# EAGLE board 32 smd (EAGLE 9.3.0)
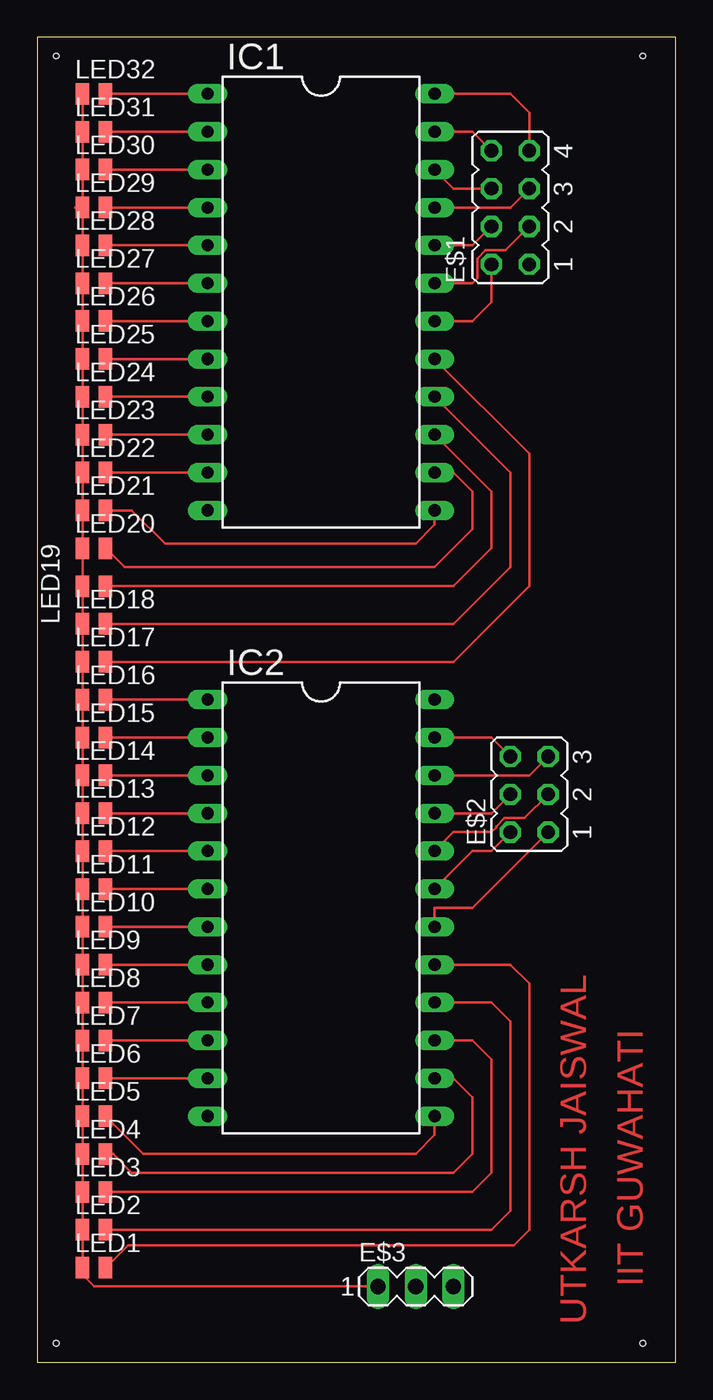
[diagram p0: board, top side]
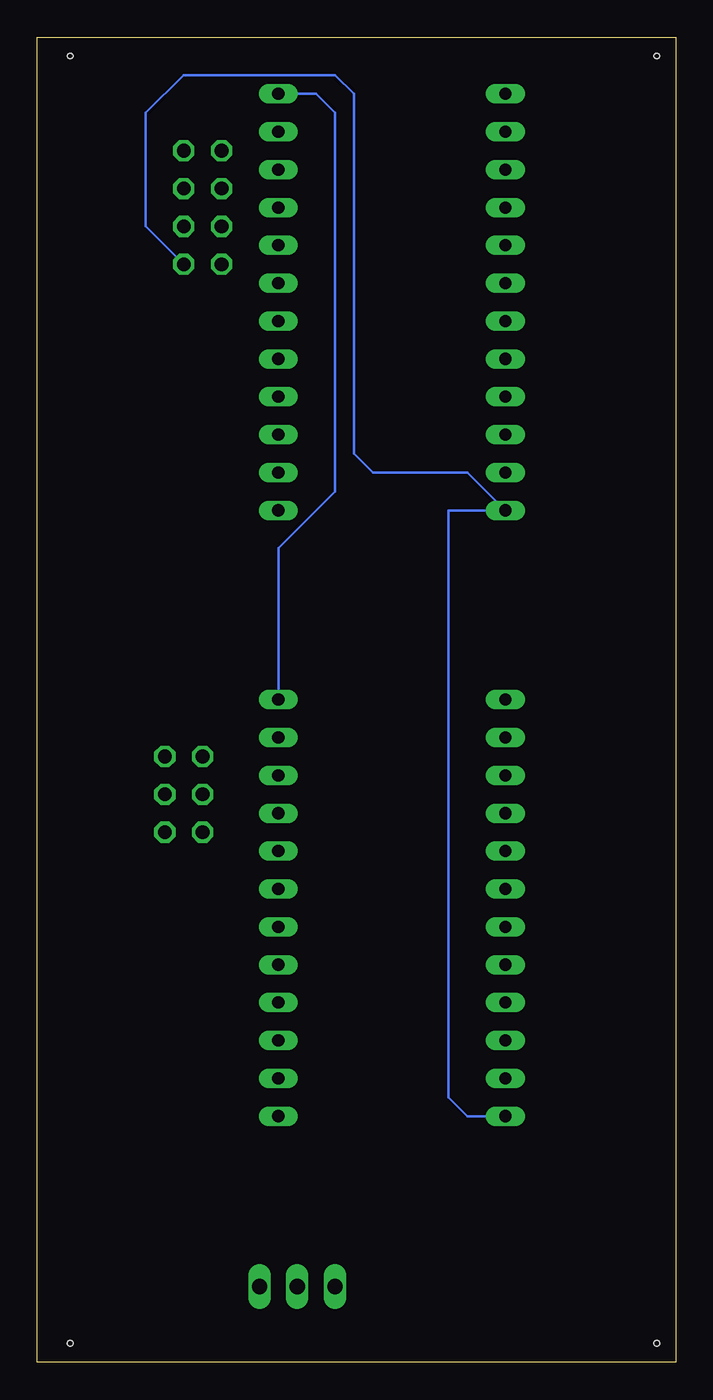
[diagram p1: board, bottom side, seen from below]

Size 42.85 x 88.89 mm. Coordinates in mm from the lower left corner, seen from the top.
Outline: 0,0 42.85,0 42.85,88.89 0,88.89 0,0
Copper layers (1*16): Top 0.035mm / dielectric 1.5mm / Bottom 0.035mm
Design rules "default": minimum track width 6mil, minimum drill 0.35mm, track to track 6mil, track to pad 6mil, pad to pad 6mil, via to via 6mil, smd to smd 6mil, copper to edge 40mil, drill to drill 6mil, minimum pad ring 10mil, minimum via ring 8mil, stop-mask expansion 4mil, vias tented up to drill 0mil, thermal gap 10mil
Holes 0.35 mm at 1.27,1.27 40.64,1.27 40.64,87.63 1.27,87.63

## Footprints (pad centres in the part's own frame; a part is rotated, then mirrored left to right if it is on the bottom)
JP4Q = drill 0.914 octagon: 1 -3.81,-1.27; 2 -3.81,1.27; 3 -1.27,-1.27; 4 -1.27,1.27; 5 1.27,-1.27; 6 1.27,1.27; 7 3.81,-1.27; 8 3.81,1.27
JP3Q = drill 0.914 octagon: 1 -2.54,-1.27; 2 -2.54,1.27; 3 0,-1.27; 4 0,1.27; 5 2.54,-1.27; 6 2.54,1.27
MA03-1 = drill 1.016 long: 1 -2.54,0; 2 0,0; 3 2.54,0
DIL24-6 = drill 0.813 long: 1 -13.97,-7.62; 2 -11.43,-7.62; 3 -8.89,-7.62; 4 -6.35,-7.62; 5 -3.81,-7.62; 6 -1.27,-7.62; 7 1.27,-7.62; 8 3.81,-7.62; 9 6.35,-7.62; 10 8.89,-7.62; 11 11.43,-7.62; 12 13.97,-7.62; 13 13.97,7.62; 14 11.43,7.62; 15 8.89,7.62; 16 6.35,7.62; 17 3.81,7.62; 18 1.27,7.62; 19 -1.27,7.62; 20 -3.81,7.62; 21 -6.35,7.62; 22 -8.89,7.62; 23 -11.43,7.62; 24 -13.97,7.62
GM1BW78140A = smd 0.9 x 1.44: A 0.77,0; C -0.77,0

## Placement (x,y rotation side)
E$1  [JP4Q]  31.75,77.47 90 top
E$2  [JP3Q]  33.02,38.1 90 top
E$3  [MA03-1]  25.4,5.08 0 top
IC1  74154N  [DIL24-6]  19.05,71.12 270 top
IC2  74154N  [DIL24-6]  19.05,30.48 270 top
LED1  GM1BW76340A  [GM1BW78140A]  3.81,6.35 0 top
LED2  GM1BW76340A  [GM1BW78140A]  3.81,8.89 0 top
LED3  GM1BW76340A  [GM1BW78140A]  3.81,11.43 0 top
LED4  GM1BW76340A  [GM1BW78140A]  3.81,13.97 0 top
LED5  GM1BW76340A  [GM1BW78140A]  3.81,16.51 0 top
LED6  GM1BW76340A  [GM1BW78140A]  3.81,19.05 0 top
LED7  GM1BW76340A  [GM1BW78140A]  3.81,21.59 0 top
LED8  GM1BW76340A  [GM1BW78140A]  3.81,24.13 0 top
LED9  GM1BW76340A  [GM1BW78140A]  3.81,26.67 0 top
LED10  GM1BW76340A  [GM1BW78140A]  3.81,29.21 0 top
LED11  GM1BW76340A  [GM1BW78140A]  3.81,31.75 0 top
LED12  GM1BW76340A  [GM1BW78140A]  3.81,34.29 0 top
LED13  GM1BW76340A  [GM1BW78140A]  3.81,36.83 0 top
LED14  GM1BW76340A  [GM1BW78140A]  3.81,39.37 0 top
LED15  GM1BW76340A  [GM1BW78140A]  3.81,41.91 0 top
LED16  GM1BW76340A  [GM1BW78140A]  3.81,44.45 0 top
LED17  GM1BW76340A  [GM1BW78140A]  3.81,46.99 0 top
LED18  GM1BW76340A  [GM1BW78140A]  3.81,49.53 0 top
LED19  GM1BW76340A  [GM1BW78140A]  3.81,52.07 0 top
LED20  GM1BW76340A  [GM1BW78140A]  3.81,54.61 0 top
LED21  GM1BW76340A  [GM1BW78140A]  3.81,57.15 0 top
LED22  GM1BW76340A  [GM1BW78140A]  3.81,59.69 0 top
LED23  GM1BW76340A  [GM1BW78140A]  3.81,62.23 0 top
LED24  GM1BW76340A  [GM1BW78140A]  3.81,64.77 0 top
LED25  GM1BW76340A  [GM1BW78140A]  3.81,67.31 0 top
LED26  GM1BW76340A  [GM1BW78140A]  3.81,69.85 0 top
LED27  GM1BW76340A  [GM1BW78140A]  3.81,72.39 0 top
LED28  GM1BW76340A  [GM1BW78140A]  3.81,74.93 0 top
LED29  GM1BW76340A  [GM1BW78140A]  3.81,77.47 0 top
LED30  GM1BW76340A  [GM1BW78140A]  3.81,80.01 0 top
LED31  GM1BW76340A  [GM1BW78140A]  3.81,82.55 0 top
LED32  GM1BW76340A  [GM1BW78140A]  3.81,85.09 0 top

## Library data of the parts
E$1 E$2 = jumper
E$3 = con-lstb
IC1 IC2 = 74xx-us
LED1-LED32 = led

## Nets
GND: E$1.1 IC1.12 IC2.12
N$1: E$3.1 LED1.C LED2.C LED3.C LED4.C LED5.C LED6.C LED7.C LED8.C LED9.C LED10.C LED11.C LED12.C LED13.C LED14.C LED15.C LED16.C LED17.C LED18.C LED19.C LED20.C LED21.C LED22.C LED23.C LED24.C LED25.C LED26.C LED27.C LED28.C LED29.C LED30.C LED31.C LED32.C
N$2: IC1.1 LED32.A
N$3: IC1.2 LED31.A
N$4: IC1.3 LED30.A
N$5: IC1.4 LED29.A
N$6: IC1.5 LED28.A
N$7: IC1.6 LED27.A
N$8: IC1.7 LED26.A
N$9: IC1.8 LED25.A
N$10: IC1.9 LED24.A
N$11: IC1.10 LED23.A
N$12: IC1.11 LED22.A
N$13: IC1.13 LED21.A
N$14: IC1.14 LED20.A
N$15: IC1.15 LED19.A
N$16: IC1.16 LED18.A
N$17: IC1.17 LED17.A
N$18: IC2.1 LED16.A
N$19: IC2.2 LED15.A
N$20: IC2.3 LED14.A
N$21: IC2.4 LED13.A
N$22: IC2.5 LED12.A
N$23: IC2.6 LED11.A
N$24: IC2.7 LED10.A
N$25: IC2.8 LED9.A
N$26: IC2.9 LED8.A
N$27: IC2.10 LED7.A
N$28: IC2.11 LED6.A
N$29: IC2.13 LED5.A
N$30: IC2.14 LED4.A
N$31: IC2.15 LED3.A
N$32: IC2.16 LED2.A
N$33: IC2.17 LED1.A
S$1: E$2.6 IC2.23
S$2: E$2.5 IC2.22
S$3: E$2.4 IC2.21
S$4: E$2.3 IC2.20
S$5: E$2.2 IC2.19
S$6: E$2.1 IC2.18
S$7: E$1.8 IC1.23
S$8: E$1.6 IC1.22
S$9: E$1.5 IC1.21
S$10: E$1.4 IC1.20
S$11: E$1.3 IC1.19
S$12: E$1.2 IC1.18
VCC: E$1.7 IC1.24 IC2.24

## Tracks (layer width: path | path; a pad name or v marks a point on that pad's centre or on a via)
GND
  Bottom 0.152: IC2.12 13.97,16.51 15.24,17.78 15.24,57.15 IC1.12 13.97,59.69 20.32,59.69 21.59,60.96 21.59,85.09 22.86,86.36 33.02,86.36 35.56,83.82 35.56,76.2 E$1.1
N$1
  Top 0.152: LED32.C LED31.C LED30.C 3.04,77.97 2.54,77.47 LED29.C LED28.C LED27.C LED26.C LED25.C LED24.C LED23.C LED22.C LED21.C LED20.C LED19.C LED18.C LED17.C LED16.C LED15.C LED14.C LED13.C LED12.C LED11.C LED10.C LED9.C LED8.C LED7.C LED6.C LED5.C LED4.C LED3.C LED2.C LED1.C 3.04,5.85 3.81,5.08 E$3.1
N$2
  Top 0.152: IC1.1 LED32.A
N$3
  Top 0.152: IC1.2 LED31.A
N$4
  Top 0.152: LED30.A IC1.3
N$5
  Top 0.152: LED29.A IC1.4
N$6
  Top 0.152: LED28.A IC1.5
N$7
  Top 0.152: LED27.A IC1.6
N$8
  Top 0.152: LED26.A IC1.7
N$9
  Top 0.152: LED25.A IC1.8
N$10
  Top 0.152: LED24.A IC1.9
N$11
  Top 0.152: LED23.A IC1.10
N$12
  Top 0.152: LED22.A IC1.11
N$13
  Top 0.152: LED21.A 6.35,57.15 8.59,54.92 25.4,54.92 26.67,56.19 IC1.13
N$14
  Top 0.152: LED20.A 5.85,53.34 26.67,53.34 29.21,55.88 29.21,58.42 27.94,59.69 IC1.14
N$15
  Top 0.152: LED19.A 27.94,52.07 30.48,54.61 30.48,58.42 IC1.15
N$16
  Top 0.152: LED18.A 27.94,49.53 31.75,53.34 31.75,59.69 IC1.16
N$17
  Top 0.152: LED17.A 27.94,46.99 33.02,52.07 33.02,60.96 IC1.17
N$18
  Top 0.152: LED16.A IC2.1
N$19
  Top 0.152: LED15.A IC2.2
N$20
  Top 0.152: LED14.A IC2.3
N$21
  Top 0.152: LED13.A IC2.4
N$22
  Top 0.152: LED12.A IC2.5
N$23
  Top 0.152: LED11.A IC2.6
N$24
  Top 0.152: LED10.A IC2.7
N$25
  Top 0.152: LED9.A IC2.8
N$26
  Top 0.152: LED8.A IC2.9
N$27
  Top 0.152: LED7.A IC2.10
N$28
  Top 0.152: LED6.A IC2.11
N$29
  Top 0.152: LED5.A 7.12,13.97 25.4,13.97 26.67,15.24 IC2.13
N$30
  Top 0.152: LED4.A 5.08,13.97 6.35,12.7 27.94,12.7 29.21,13.97 29.21,17.78 27.94,19.05 IC2.14
N$31
  Top 0.152: LED3.A 29.21,11.43 30.48,12.7 30.48,20.32 29.21,21.59 IC2.15
N$32
  Top 0.152: IC2.16 30.48,24.13 31.75,22.86 31.75,10.16 30.48,8.89 LED2.A
N$33
  Top 0.152: IC2.17 31.75,26.67 33.02,25.4 33.02,8.89 31.98,7.85 6.08,7.85 LED1.A
S$1
  Top 0.152: IC2.23 30.48,41.91 E$2.6
S$2
  Top 0.152: IC2.22 33.02,39.37 E$2.5
S$3
  Top 0.152: IC2.21 30.48,36.83 E$2.4
S$4
  Top 0.152: IC2.20 27.94,35.56 30.48,35.56 30.81,35.89 30.81,35.95 31.36,36.5 32.69,36.5 E$2.3
S$5
  Top 0.152: IC2.19 29.21,34.29 30.48,34.29 E$2.2
S$6
  Top 0.152: IC2.18 26.67,30.48 29.21,30.48 E$2.1
S$7
  Top 0.152: IC1.23 29.21,82.55 E$1.8
S$8
  Top 0.152: IC1.22 27.94,78.74 E$1.6
S$9
  Top 0.152: IC1.21 31.75,77.47 E$1.5
S$10
  Top 0.152: IC1.20 29.21,74.93 E$1.4
S$11
  Top 0.152: IC1.19 29.21,72.39 29.54,72.72 29.54,74.05 30.09,74.6 31.42,74.6 E$1.3
S$12
  Top 0.152: IC1.18 29.21,69.85 30.48,71.12 E$1.2
VCC
  Top 0.152: E$1.7 33.02,83.82 31.75,85.09 IC1.24
  Bottom 0.152: IC2.24 26.67,54.61 22.86,58.42 22.86,83.82 24.13,85.09 IC1.24

## Text on the board
Top: IIT GUWAHATI | UTKARSH JAISWAL